# Altium PCB FPGA_Board.PcbDoc (part 1 of 10)
Units mm, origin at the board's own origin, x right, y up, seen from the top; angles counter-clockwise.
Board outline 103.63 x 86.08 mm, 2 copper layers (Top Layer, Bottom Layer); 109 components, 200 nets, 667 pads, 237 vias.
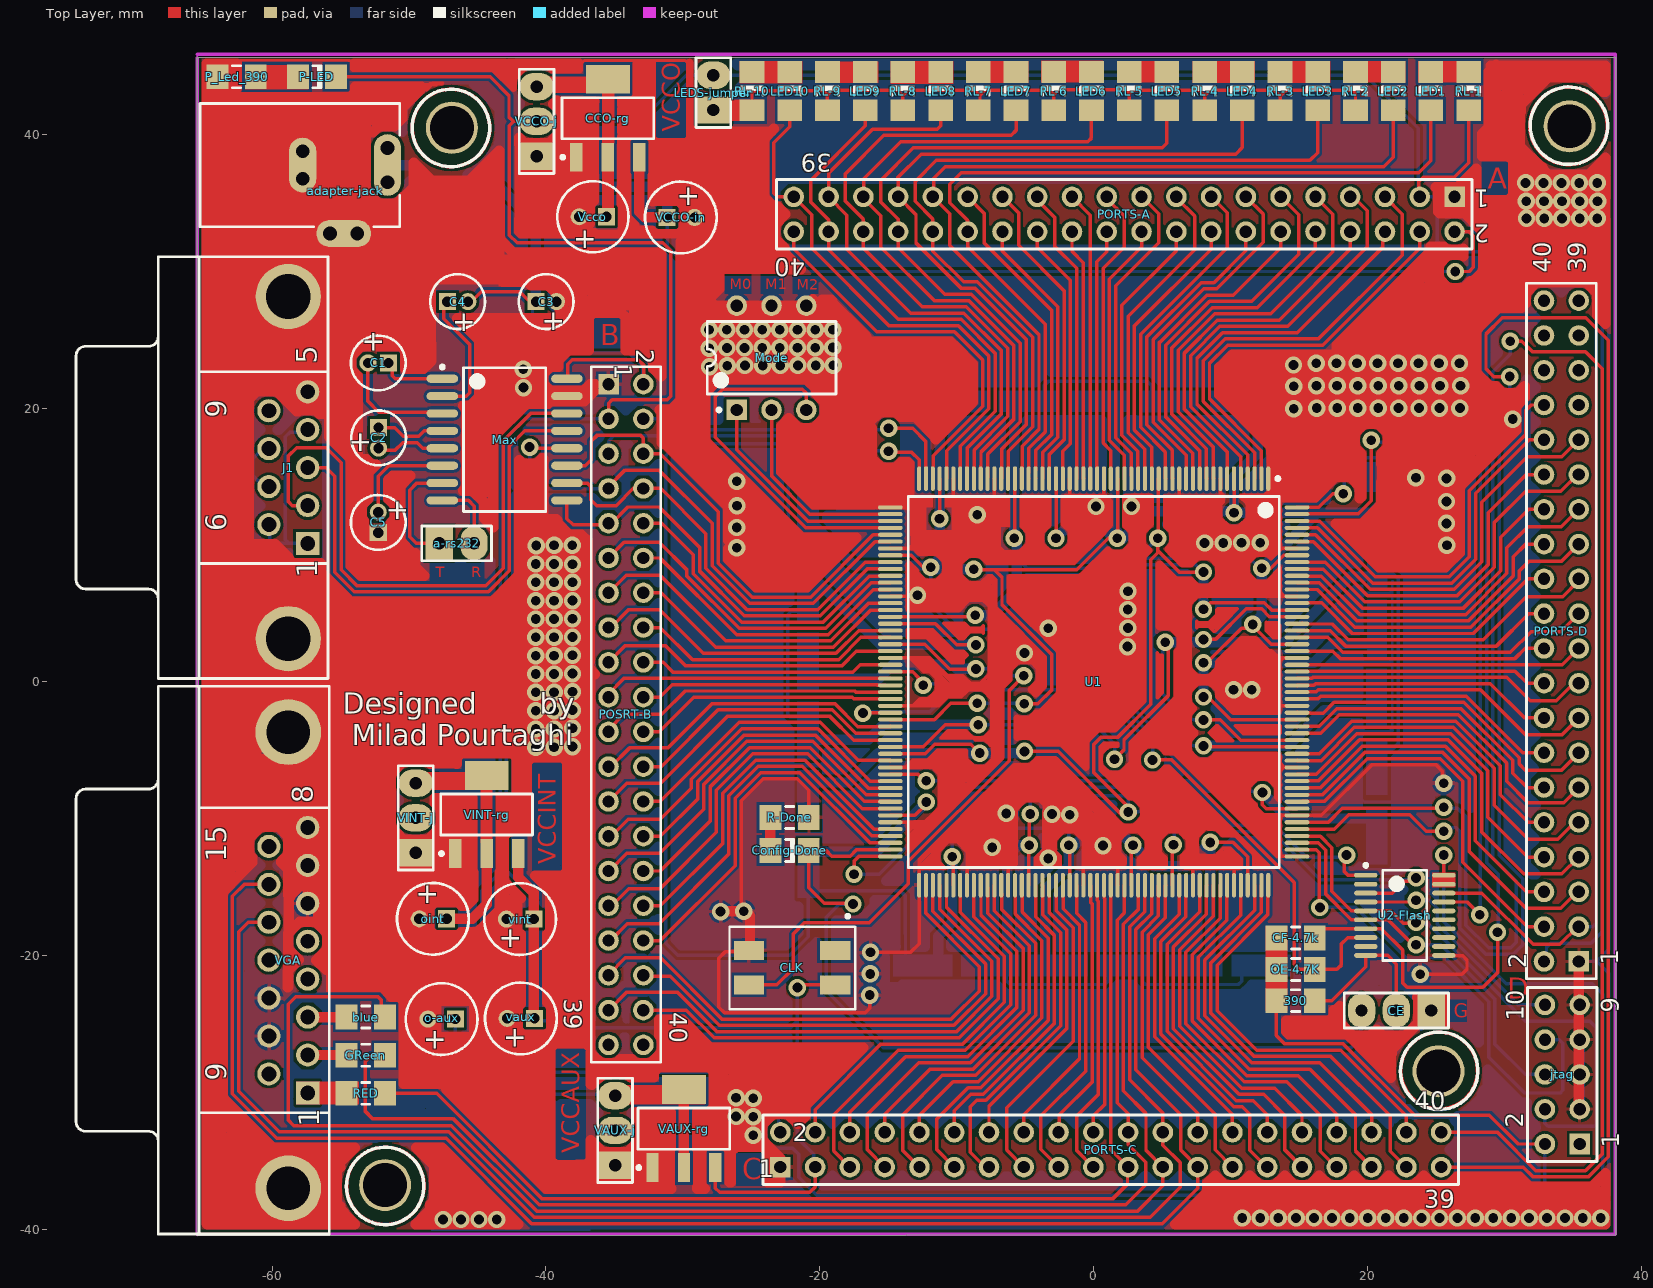
[diagram p0: Top Layer view]
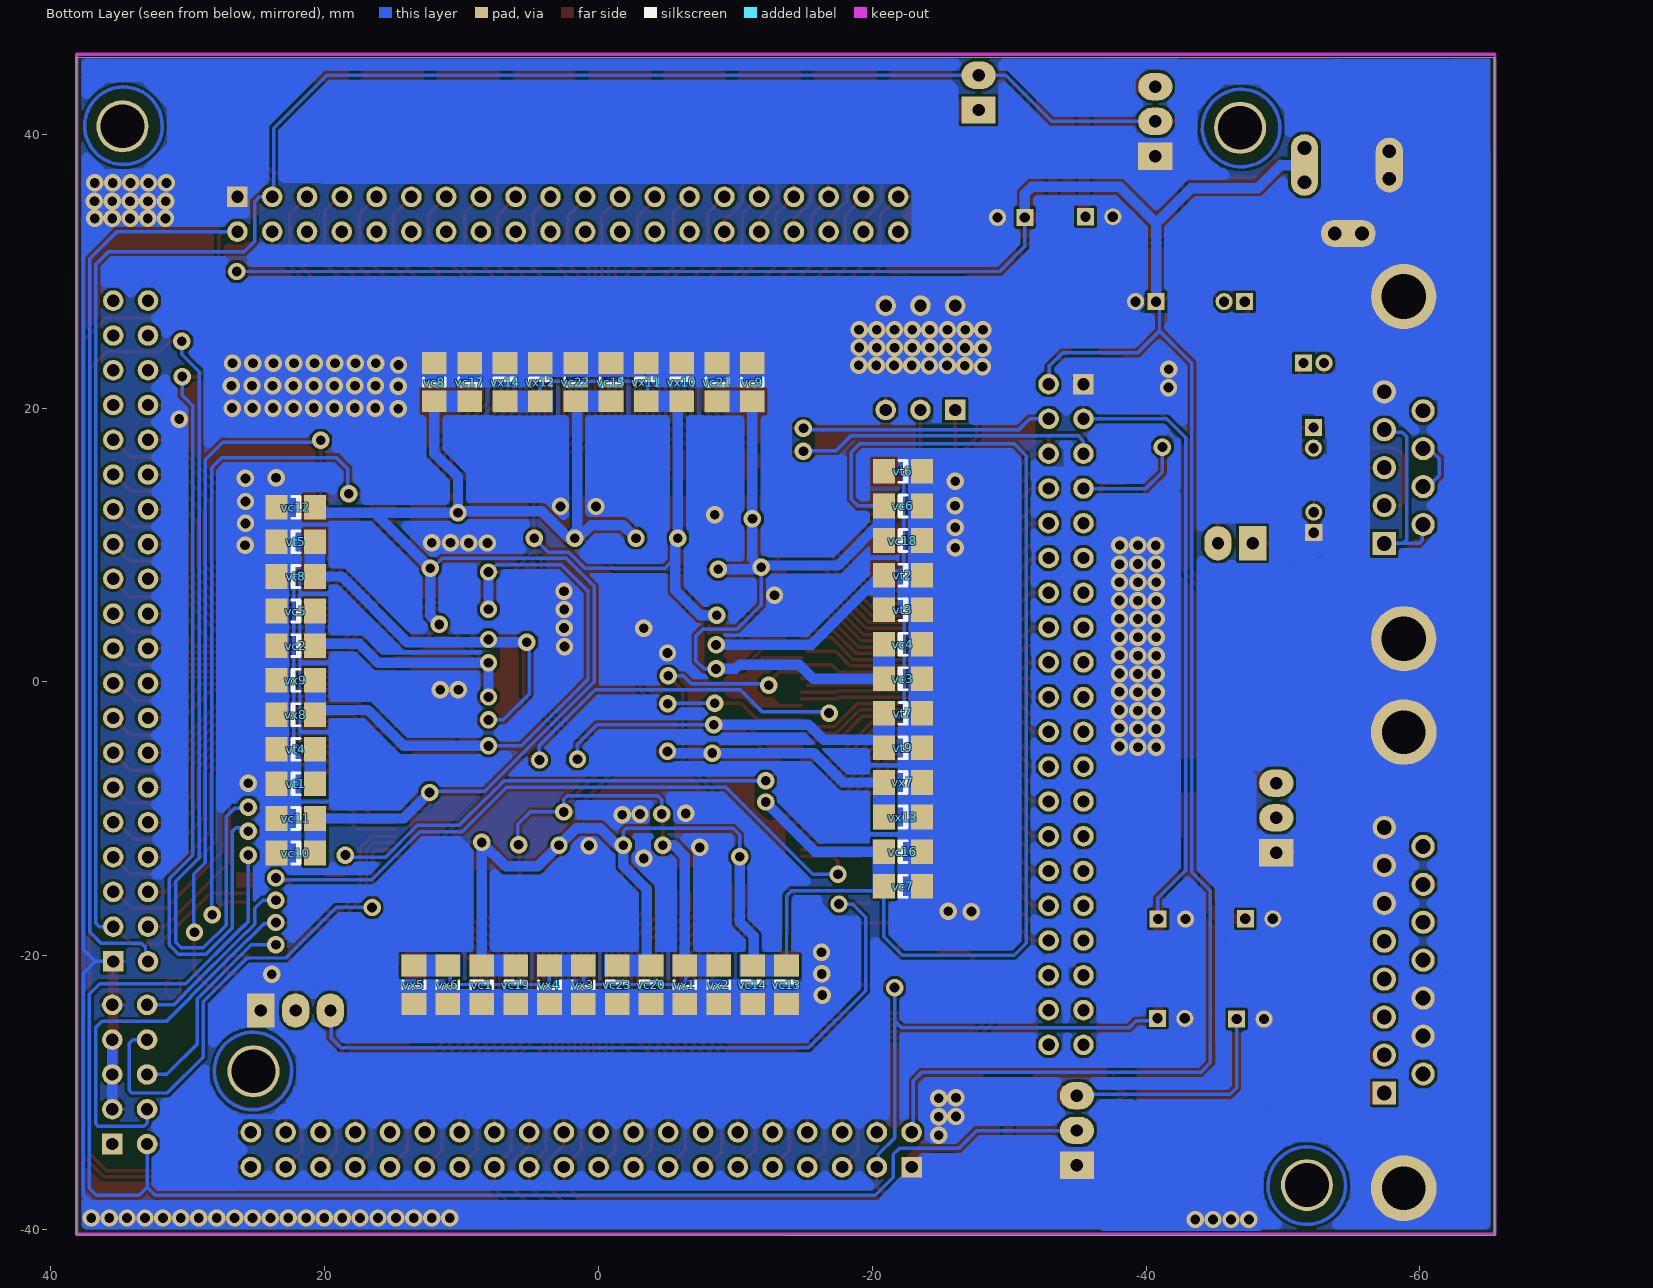
[diagram p1: Bottom Layer view, seen from below]

## Layer stack, top to bottom
Top Solder: solder mask 0.0102, Solder Resist, Dk 3.5
Top Layer: signal copper 0.0356
Dielectric1: dielectric 0.32, FR-4, Dk 4.8
Bottom Layer: signal copper 0.0356
Bottom Solder: solder mask 0.0102, Solder Resist, Dk 3.5

## Board outline
-65.482,-40.46 38.118,-40.383 38.148,45.62 -65.482,45.6

## Design rules (kind name [scope] priority, off if disabled: settings)
Clearance [All] p1: gap=0.203 ignorepadtopadclearanceinfootprint=FALSE except(0: Arc-Hole Track-Hole SMDPad-Hole THPad-Hole Via-Hole Fill-Hole Poly-Hole Region-Hole Text-Hole)
PolygonConnect [All] p1: connectstyle=Relief reliefconductorwidth=0.254 reliefentries=4 polygonreliefangle="90 Angle" airgapwidth=0.254
RoutingVias [All] p1: holewidth=0.711 width=1.27 viastyle="Through Hole" minholewidth=0.711 minwidth=1.27 maxholewidth=0.711 maxwidth=1.27
SilkToSolderMaskClearance SilkscreenOverComponentPads [IsPad] p1: minsilkscreentomaskgap=0.254 clearancetoexposedcopper=TRUE
SolderMaskExpansion [All] p1: expansion=0.102
Width [All] p1: maxlimit=0.762 minlimit=0.203 preferedwidth=0.279
29 further rules are at their usual default settings.

## Components (designator, comment, footprint, x,y, rotation, side; value= is the part's Value field where it differs from the comment)
390 "RES" 8-1206 14.75,-23.275 r0 top
a-rs232 "MHDR1X2" HDR1X2 -47.795,10.125 r0 top
adapter-jack "PWR2.5" KLD-0202 -65.275,37.75 r0 top
blue "RES" 8RB-1206 -53.163,-24.475 r180 top
C1 "94SH105X0025ABP" A' -52.25,23.3 r180 top
C2 "94SH105X0025ABP" A' -52.225,17.825 r270 top
C3 "94SH105X0025ABP" A' -39.985,27.775 r0 top
C4 "94SH105X0025ABP" A' -46.453,27.775 r0 top
C5 "94SH105X0025ABP" A' -52.25,11.65 r90 top
CCO-rg "AMS1117 3.3" MP04A_L -35.479,41.175 r90 top
CE "Header 3" HDR1X3 24.65,-24 r180 top
CF-4.7k "RES" 8-1206 14.75,-18.7 r0 top
CLK "50MHZ" 50mhz -22.025,-20.875 r270 top
Config-Done "HSMX-C670" 1206 -22.205,-12.313 r180 top
GReen "RES" 8RB-1206 -53.163,-27.263 r180 top
J1 "D Connector 9" DSUB1.385-2H9 -68.322,15.65 r90 top
jtag "MHDR2X5" HDR2X5 35.5,-33.75 r90 top
LED1 "HSMX-C670" 1206 24.633,43.15 r270 top
LED2 "HSMX-C670" 1206 21.879,43.15 r270 top
LED3 "HSMX-C670" 1206 16.369,43.15 r270 top
LED4 "HSMX-C670" 1206 10.86,43.15 r270 top
LED5 "HSMX-C670" 1206 5.35,43.15 r270 top
LED6 "HSMX-C670" 1206 -0.159,43.15 r270 top
LED7 "HSMX-C670" 1206 -5.669,43.15 r270 top
LED8 "HSMX-C670" 1206 -11.178,43.15 r270 top
LED9 "HSMX-C670" 1206 -16.688,43.15 r270 top
LED10 "HSMX-C670" 1206 -22.197,43.15 r270 top
LEDS-jumper "Header 2" HDR1X2 -27.772,41.77 r90 top
Max "MAX232CWE" WSO16_N -43.021,17.7 r0 top
Mode "SW DIP-3" DIP-6 -23.525,23.675 r90 top
o-aux "100uf" B -47.619,-24.625 r180 top
OE-4.7K "RES" 8-1206 14.75,-21 r0 top
oint "100uf" B -48.257,-17.3 r180 top
P-LED "HSMX-C670" 1206 -56.725,44.2 r180 top
P_Led_390 "RES" 8-1206 -62.6,44.2 r180 top
PORTS-A "MHDR2X20" HDR2X20 26.36,35.429 r180 top
PORTS-C "MHDR2X20" HDR2X20 -22.882,-35.435 r0 top
PORTS-D "MHDR2X20" HDR2X20 35.433,-20.415 r90 top
POSRT-B "MHDR2X20" HDR2X20 -35.429,21.75 r270 top
R-Done "RES" 8RB-1206 -22.205,-9.9 r0 top
RED "RES" 8RB-1206 -53.163,-30.05 r180 top
RL-1 "RES" 1206 27.388,43.15 r270 top
RL-2 "RES" 1206 19.124,43.15 r270 top
RL-3 "RES" 1206 13.614,43.15 r270 top
RL-4 "RES" 1206 8.105,43.15 r270 top
RL-5 "RES" 1206 2.595,43.15 r270 top
RL-6 "RES" 1206 -2.914,43.15 r270 top
RL-7 "RES" 1206 -8.424,43.15 r270 top
RL-8 "RES" 1206 -13.933,43.15 r270 top
RL-9 "RES" 1206 -19.443,43.15 r270 top
RL-10 "RES" 1206 -24.952,43.15 r270 top
U1 "XC3S400-4PQ208C" PQ208_N 0.003,0 r270 top
U2-Flash "XCF02SVO20C" VO20_N 22.725,-17.05 r0 top
vaux "100uf" B -41.833,-24.575 r180 top
VAUX-j "" HDR1X3 -34.95,-35.3 r90 top
VAUX-rg "AMS1117 2.5" SOT223_L -29.925,-32.625 r90 top
vc1 "" 1206 8.519,-22.12 r270 bottom
vc2 "" 1206 22.1,2.65 r0 bottom
vc3 "" 1206 -22.25,0.228 r180 bottom
vc4 "" 1206 -22.25,2.752 r180 bottom
vc5 "" 1206 22.1,5.175 r0 bottom
vc6 "" 1206 -22.25,12.85 r180 bottom
vc7 "" 1206 -22.25,-14.92 r180 bottom
vc8 "" 1206 11.975,21.9 r90 bottom
vc9 "" 1206 -11.25,21.9 r90 bottom
vc10 "" 1206 22.1,-12.5 r0 bottom
vc11 "" 1206 22.1,-9.975 r0 bottom
vc12 "" 1206 22.1,12.75 r0 bottom
vc13 "" 1206 -13.742,-22.12 r270 bottom
vc14 "" 1206 -11.269,-22.12 r270 bottom
vc15 "" 1206 -0.928,21.9 r90 bottom
vc16 "" 1206 -22.25,-12.395 r180 bottom
vc17 "" 1206 9.394,21.9 r90 bottom
vc18 "" 1206 -22.25,10.326 r180 bottom
vc19 "" 1206 6.045,-22.12 r270 bottom
vc20 "" 1206 -3.848,-22.12 r270 bottom
vc21 "" 1206 -8.669,21.9 r90 bottom
vc22 "" 1206 1.653,21.9 r90 bottom
vc23 "" 1206 -1.375,-22.12 r270 bottom
Vcco "100uf" B -36.575,33.975 r180 top
VCCO-in "100uf" B -30.151,33.925 r0 top
VCCO-j "" HDR1X3 -40.678,38.4 r90 top
VGA "D Connector 15" DSUB1.385-2H15 -68.322,-20.325 r90 top
vint "100uf" B -41.888,-17.325 r180 top
VINT-j "" HDR1X3 -49.512,-12.47 r90 top
VINT-rg "AMS1117 1.2" MP04A_L -44.332,-9.69 r90 top
vt1 "" 1206 22.1,-7.45 r180 bottom
vt2 "" 1206 -22.25,7.801 r0 bottom
vt3 "" 1206 -22.25,5.277 r0 bottom
vt4 "" 1206 22.1,-4.925 r180 bottom
vt5 "" 1206 22.1,10.225 r180 bottom
vt6 "" 1206 -22.25,15.375 r0 bottom
vt7 "" 1206 -22.25,-2.297 r0 bottom
vt8 "" 1206 22.1,7.7 r180 bottom
vt9 "" 1206 -22.25,-4.822 r0 bottom
vx1 "" 1206 -6.322,-22.12 r90 bottom
vx2 "" 1206 -8.795,-22.12 r90 bottom
vx3 "" 1206 1.099,-22.12 r90 bottom
vx4 "" 1206 3.572,-22.12 r90 bottom
vx5 "" 1206 13.466,-22.12 r90 bottom
vx6 "" 1206 10.992,-22.12 r90 bottom
vx7 "" 1206 -22.25,-7.346 r0 bottom
vx8 "" 1206 22.1,-2.4 r180 bottom
vx9 "" 1206 22.1,0.125 r180 bottom
vx10 "" 1206 -6.089,21.9 r270 bottom
vx11 "" 1206 -3.508,21.9 r270 bottom
vx12 "" 1206 4.233,21.9 r270 bottom
vx13 "" 1206 -22.25,-9.871 r0 bottom
vx14 "" 1206 6.814,21.9 r270 bottom

## Footprints (in the part's own frame and the unit in brackets; to place one, negate y for a bottom-side part, rotate by r counter-clockwise, add the part's x,y. Pads: shape width x height; smd on the part's side, far side on the other; paste and mask are expansions set on the pad)
8-1206 [mm] "Chip Resistor; Body 3.1 x 1.6 mm (LxW typ)"
  rect 1.6x1.8 smd: 1(-1.4,0) 2(1.4,0)
  silkscreen extent -0.3,-0.8 0.3,0.8
8RB-1206 [mm] "Chip Resistor; Body 3.2 x 1.6 mm (LxW typ)"
  rect 1.6x1.8 smd: 1(-1.4,0) 2(1.4,0)
  silkscreen extent -0.3,-0.8 0.3,0.8
50mhz [mm]
  rect 1.4x2.2 smd: 1(-1.25,3.15) 2(-1.25,-3.15) 3(1.25,-3.15) 4(1.25,3.15)
  silkscreen extent -3.88,-4.57 3.02,4.62
1206 [mm] "Chip Capacitor; Body 3.2 x 1.6 mm (LxW typ)"
  rect 1.6x1.8 smd: 1(-1.4,0) 2(1.4,0)
  silkscreen extent -0.3,-0.8 0.3,0.8
A' [mm] "Capacitor, Electrolytic, Radial; Body 4 x 5 mm (Dia.xH typ); Pin Spacing 1.5 mm (typ)"
  rect 1.25x1.25 hole 0.75: 1(-0.75,0)
  round 1.25 hole 0.75: 2(0.75,0)
  silkscreen extent -2,-2 2,2
B [mm] "Capacitor, Electrolytic, Radial; Body 5 x 6.8 mm (Dia.xH typ); Pin Spacing 2 mm (typ)"
  rect 1.25x1.25 hole 0.75: 1(-1,0)
  round 1.25 hole 0.75: 2(1,0)
  silkscreen extent -2.62,-2.62 2.62,2.62
DIP-6 [mm] "DIP; 6 Leads; Row Spacing 7.62 mm; Pitch 2.54 mm"
  rect 1.5x1.5 hole 0.9: 1(-3.81,2.54)
  round 1.5 hole 0.9: 2(-3.81,0) 3(-3.81,-2.54) 4(3.81,-2.54) 5(3.81,0) 6(3.81,2.54)
  silkscreen extent -3.93,-4.7 2.65,4.7, body extent -3.55,-4.7 3.55,4.7, height 5.46
DSUB1.385-2H9 [mm] "Connector; D Subminiature; 9 Position; Right Angle; Pitch 1.385 mm"
  rect 1.69x1.69 hole 1.09: 1(-5.54,-10.92)
  round 1.69 hole 1.09: 2(-2.77,-10.92) 3(0,-10.92) 4(2.77,-10.92) 5(5.54,-10.92) 6(-4.155,-8.08) 7(-1.385,-8.08) 8(1.385,-8.08) 9(4.155,-8.08)
  round 4.76 hole 3.26: 10(-12.495,-9.5) 11(12.495,-9.5)
  silkscreen extent -15.4,-12.4 15.4,6
DSUB1.385-2H15 [mm] "Connector; D Subminiature; 15 Position; Right Angle; Pitch 1.385 mm"
  rect 1.69x1.69 hole 1.09: 1(-9.695,-10.92)
  round 1.69 hole 1.09: 2(-6.925,-10.92) 3(-4.155,-10.92) 4(-1.385,-10.92) 5(1.385,-10.92) 6(4.155,-10.92) 7(6.925,-10.92) 8(9.695,-10.92) 9(-8.31,-8.08) 10(-5.54,-8.08) 11(-2.77,-8.08) 12(0,-8.08) 13(2.77,-8.08) 14(5.54,-8.08) 15(8.31,-8.08)
  round 4.8 hole 3.18: 16(-16.66,-9.5) 17(16.66,-9.5)
  silkscreen extent -20,-12.5 20,6
HDR1X2 [mm] "Connector; Header; 2 Position"
  rect 2x2.5 hole 0.9: 1(0,0)
  oval 2x2.5 hole 0.9: 2(2.54,0)
  silkscreen extent -1.27,-1.27 3.81,1.27
HDR1X3 [mm] "Connector; Header; 3 Position"
  rect 2x2.5 hole 0.9: 1(0,0)
  oval 2x2.5 hole 0.9: 2(2.54,0) 3(5.08,0)
  silkscreen extent -1.27,-1.27 6.35,1.27
HDR2X5 [mm] "Connector; Header; 5x2 Position"
  rect 1.5x1.5 hole 0.9: 1(0,0)
  round 1.5 hole 0.9: 2(0,2.54) 3(2.54,0) 4(2.54,2.54) 5(5.08,0) 6(5.08,2.54) 7(7.62,0) 8(7.62,2.54) 9(10.16,0) 10(10.16,2.54)
  silkscreen extent -1.27,-1.27 11.43,3.81
HDR2X20 [mm] "Connector; Header; 20x2 Position"
  rect 1.5x1.5 hole 0.9: 1(0,0)
  round 1.5 hole 0.9: 2(0,2.54) 3(2.54,0) 4(2.54,2.54) 5(5.08,0) 6(5.08,2.54) 7(7.62,0) 8(7.62,2.54) 9(10.16,0) 10(10.16,2.54) 11(12.7,0) 12(12.7,2.54) 13(15.24,0) 14(15.24,2.54) 15(17.78,0) 16(17.78,2.54) 17(20.32,0) 18(20.32,2.54) 19(22.86,0) 20(22.86,2.54) 21(25.4,0) 22(25.4,2.54) 23(27.94,0) 24(27.94,2.54) 25(30.48,0) 26(30.48,2.54) 27(33.02,0) 28(33.02,2.54) 29(35.56,0) 30(35.56,2.54) 31(38.1,0) 32(38.1,2.54) 33(40.64,0) 34(40.64,2.54) 35(43.18,0) 36(43.18,2.54) 37(45.72,0) 38(45.72,2.54) 39(48.26,0) 40(48.26,2.54)
  silkscreen extent -1.27,-1.27 49.53,3.81
KLD-0202 [mm] "DC Power Jack, 2.5mm, KLD Series, PCB Mount"
  oval 2x4.5 all layers, no hole: 1(13.7,0)
  round 1.5 hole 1: 1A(13.7,-1.25) 1B(13.7,1.25) 2A(7.5,-1) 2B(7.5,1) 3A(9.5,-5) 3B(11.5,-5)
  oval 2x4 all layers, no hole: 2(7.5,0)
  oval 4x2 all layers, no hole: 3(10.5,-5)
  silkscreen extent 0,-4.5 14.6,4.5
MP04A_L [mm] "SOT223, 4-Leads, Body 6.5x3.5mm, Pitch 2.3mm, Lead Span 7mm, IPC High Density"
  rect 2.1x0.9 smd: 1(-2.85,2.3) 2(-2.85,0) 3(-2.85,-2.3)
  rect 2.1x3.2 smd: 4(2.85,0)
  silkscreen extent -2.97,-3.35 1.5,3.42, body extent -1.85,-3.35 1.85,3.35, height 1.8
PQ208_N [mm] "Shrink QFP, 208-Leads, Body 28x28mm, Pitch 0.5mm, IPC Medium Density"
  oval 1.8x0.3 smd: 1(-14.85,12.75) 2(-14.85,12.25) 3(-14.85,11.75) 4(-14.85,11.25) 5(-14.85,10.75) 6(-14.85,10.25) 7(-14.85,9.75) 8(-14.85,9.25) 9(-14.85,8.75) 10(-14.85,8.25) 11(-14.85,7.75) 12(-14.85,7.25) 13(-14.85,6.75) 14(-14.85,6.25) 15(-14.85,5.75) 16(-14.85,5.25) 17(-14.85,4.75) 18(-14.85,4.25) 19(-14.85,3.75) 20(-14.85,3.25) 21(-14.85,2.75) 22(-14.85,2.25) 23(-14.85,1.75) 24(-14.85,1.25) 25(-14.85,0.75) 26(-14.85,0.25) 27(-14.85,-0.25) 28(-14.85,-0.75) 29(-14.85,-1.25) 30(-14.85,-1.75) 31(-14.85,-2.25) 32(-14.85,-2.75) 33(-14.85,-3.25) 34(-14.85,-3.75) 35(-14.85,-4.25) 36(-14.85,-4.75) 37(-14.85,-5.25) 38(-14.85,-5.75) 39(-14.85,-6.25) 40(-14.85,-6.75) 41(-14.85,-7.25) 42(-14.85,-7.75) 43(-14.85,-8.25) 44(-14.85,-8.75) 45(-14.85,-9.25) 46(-14.85,-9.75) 47(-14.85,-10.25) 48(-14.85,-10.75) 49(-14.85,-11.25) 50(-14.85,-11.75) 51(-14.85,-12.25) 52(-14.85,-12.75) 105(14.85,-12.75) 106(14.85,-12.25) 107(14.85,-11.75) 108(14.85,-11.25) 109(14.85,-10.75) 110(14.85,-10.25) 111(14.85,-9.75) 112(14.85,-9.25) 113(14.85,-8.75) 114(14.85,-8.25) 115(14.85,-7.75) 116(14.85,-7.25) 117(14.85,-6.75) 118(14.85,-6.25) 119(14.85,-5.75) 120(14.85,-5.25) 121(14.85,-4.75) 122(14.85,-4.25) 123(14.85,-3.75) 124(14.85,-3.25) 125(14.85,-2.75) 126(14.85,-2.25) 127(14.85,-1.75) 128(14.85,-1.25) 129(14.85,-0.75) 130(14.85,-0.25) 131(14.85,0.25) 132(14.85,0.75) 133(14.85,1.25) 134(14.85,1.75) 135(14.85,2.25) 136(14.85,2.75) 137(14.85,3.25) 138(14.85,3.75) 139(14.85,4.25) 140(14.85,4.75) 141(14.85,5.25) 142(14.85,5.75) 143(14.85,6.25) 144(14.85,6.75) 145(14.85,7.25) 146(14.85,7.75) 147(14.85,8.25) 148(14.85,8.75) 149(14.85,9.25) 150(14.85,9.75) 151(14.85,10.25) 152(14.85,10.75) 153(14.85,11.25) 154(14.85,11.75) 155(14.85,12.25) 156(14.85,12.75)
  oval 0.3x1.8 smd: 53(-12.75,-14.85) 54(-12.25,-14.85) 55(-11.75,-14.85) 56(-11.25,-14.85) 57(-10.75,-14.85) 58(-10.25,-14.85) 59(-9.75,-14.85) 60(-9.25,-14.85) 61(-8.75,-14.85) 62(-8.25,-14.85) 63(-7.75,-14.85) 64(-7.25,-14.85) 65(-6.75,-14.85) 66(-6.25,-14.85) 67(-5.75,-14.85) 68(-5.25,-14.85) 69(-4.75,-14.85) 70(-4.25,-14.85) 71(-3.75,-14.85) 72(-3.25,-14.85) 73(-2.75,-14.85) 74(-2.25,-14.85) 75(-1.75,-14.85) 76(-1.25,-14.85) 77(-0.75,-14.85) 78(-0.25,-14.85) 79(0.25,-14.85) 80(0.75,-14.85) 81(1.25,-14.85) 82(1.75,-14.85) 83(2.25,-14.85) 84(2.75,-14.85) 85(3.25,-14.85) 86(3.75,-14.85) 87(4.25,-14.85) 88(4.75,-14.85) 89(5.25,-14.85) 90(5.75,-14.85) 91(6.25,-14.85) 92(6.75,-14.85) 93(7.25,-14.85) 94(7.75,-14.85) 95(8.25,-14.85) 96(8.75,-14.85) 97(9.25,-14.85) 98(9.75,-14.85) 99(10.25,-14.85) 100(10.75,-14.85) 101(11.25,-14.85) 102(11.75,-14.85) 103(12.25,-14.85) 104(12.75,-14.85) 157(12.75,14.85) 158(12.25,14.85) 159(11.75,14.85) 160(11.25,14.85) 161(10.75,14.85) 162(10.25,14.85) 163(9.75,14.85) 164(9.25,14.85) 165(8.75,14.85) 166(8.25,14.85) 167(7.75,14.85) 168(7.25,14.85) 169(6.75,14.85) 170(6.25,14.85) 171(5.75,14.85) 172(5.25,14.85) 173(4.75,14.85) 174(4.25,14.85) 175(3.75,14.85) 176(3.25,14.85) 177(2.75,14.85) 178(2.25,14.85) 179(1.75,14.85) 180(1.25,14.85) 181(0.75,14.85) 182(0.25,14.85) 183(-0.25,14.85) 184(-0.75,14.85) 185(-1.25,14.85) 186(-1.75,14.85) 187(-2.25,14.85) 188(-2.75,14.85) 189(-3.25,14.85) 190(-3.75,14.85) 191(-4.25,14.85) 192(-4.75,14.85) 193(-5.25,14.85) 194(-5.75,14.85) 195(-6.25,14.85) 196(-6.75,14.85) 197(-7.25,14.85) 198(-7.75,14.85) 199(-8.25,14.85) 200(-8.75,14.85) 201(-9.25,14.85) 202(-9.75,14.85) 203(-10.25,14.85) 204(-10.75,14.85) 205(-11.25,14.85) 206(-11.75,14.85) 207(-12.25,14.85) 208(-12.75,14.85)
  silkscreen extent -14.97,-13.55 13.55,13.58, body extent -14,-14 14,14, height 4.1
SOT223_L [mm] "SOT223, 4-Leads, Body 6.5x3.5mm, Pitch 2.3mm, Lead Span 7mm, IPC High Density"
  rect 2.1x0.9 smd: 1(-2.85,2.3) 2(-2.85,0) 3(-2.85,-2.3)
  rect 2.1x3.2 smd: 4(2.85,0)
  silkscreen extent -2.97,-3.35 1.5,3.42, body extent -1.85,-3.35 1.85,3.35, height 1.7
VO20_N [mm] "TSOP, 20-Leads, Body 6.5x4.4mm, Pitch 0.65mm, IPC Medium Density"
  oval 1.7x0.35 smd: 1(-2.85,2.925) 2(-2.85,2.275) 3(-2.85,1.625) 4(-2.85,0.975) 5(-2.85,0.325) 6(-2.85,-0.325) 7(-2.85,-0.975) 8(-2.85,-1.625) 9(-2.85,-2.275) 10(-2.85,-2.925) 11(2.85,-2.925) 12(2.85,-2.275) 13(2.85,-1.625) 14(2.85,-0.975) 15(2.85,-0.325) 16(2.85,0.325) 17(2.85,0.975) 18(2.85,1.625) 19(2.85,2.275) 20(2.85,2.925)
  silkscreen extent -2.97,-3.3 1.6,3.77, body extent -2.25,-3.3 2.25,3.3, height 1.2
WSO16_N [mm] "SOIC, 16-Leads, Body 10.3x7.5mm, Pitch 1.27mm, IPC Medium Density"
  oval 2.3x0.6 smd: 1(-4.55,4.445) 2(-4.55,3.175) 3(-4.55,1.905) 4(-4.55,0.635) 5(-4.55,-0.635) 6(-4.55,-1.905) 7(-4.55,-3.175) 8(-4.55,-4.445) 9(4.55,-4.445) 10(4.55,-3.175) 11(4.55,-1.905) 12(4.55,-0.635) 13(4.55,0.635) 14(4.55,1.905) 15(4.55,3.175) 16(4.55,4.445)
  silkscreen extent -4.67,-5.25 3,5.42, body extent -3.75,-5.25 3.75,5.25, height 2.65

## Part data
390 blue CF-4.7k GReen OE-4.7K P_Led_390 R-Done RED RL-1 RL-2 RL-3 RL-4 RL-5 RL-6 RL-7 RL-8 RL-9 RL-10: "Resistor"
a-rs232 LEDS-jumper: "Header, 2-Pin"
adapter-jack: "Low Voltage Power Supply Connector"
C1 C2 C3 C4 C5: "Solid Aluminum Capacitor with Organic Semiconductor Electrolyte: 1uF, 25V, Bulk Pack"
CCO-rg VAUX-rg VINT-rg: library part REG1117-3.3, "800mA and 1A Low Dropout Positive Regulator 2.85V, 3.3V, 5V, and Adjustable"
CE: "Header, 3-Pin"
Config-Done LED1 LED2 LED3 LED4 LED5 LED6 LED7 LED8 LED9 LED10 P-LED: "RED AS AlGaAs SMD LED"
J1: "Receptacle Assembly, 9 Position, Right Angle"
jtag: "Header, 5-Pin, Dual row"
Max: "+5V Powered RS-232 Driver/Receiver"
Mode: "DIP Switch, 3 Position, SPST"
o-aux oint vaux Vcco vint: library part 94SA107X0016EBP, "Solid Aluminum Capacitor with Organic Semiconductor Electrolyte: 100uF, 16V, Bulk Pack"
PORTS-A PORTS-C PORTS-D POSRT-B: "Header, 20-Pin, Dual row"
U1: "Spartan-3 1.2V FPGA, 141 User I/Os, 208-Pin PQFP, Standard Performance, Commercial Grade"
U2-Flash: "XCF00S Series, Platform Flash In-System Programmable Configuration 3.3V PROM, 20-Pin TSOP, 2-Megabit, Commercial Grade"
VAUX-j VCCO-j VINT-j: library part "Header 3", "Header, 3-Pin"
vc1 vc2 vc3 vc4 vc5 vc6 vc7 vc8 vc9 vc10 vc11 vc12 vc13 vc14 vc15 vc16 vc17 vc18 vc19 vc20 vc21 vc22 vc23 vt1 vt2 vt3 vt4 vt5 vt6 vt7 vt8 vt9 vx1 vx2 vx3 vx4 vx5 vx6 vx7 vx8 vx9 vx10 vx11 vx12 vx13 vx14: library part C1206, "Ceramic Chip Capacitor - Standard"
VCCO-in: library part TC10-6C3RM, "Subminiature, Leaded Solid Tantalum Capacitor: Radial-Lead, Polarised, 10uF, 20% Tolerance, 6 WVDC @ +85°C"
VGA: "Receptacle Assembly, 15 Position, Right Angle"

## Free pads (board coordinates)
  round 3.8 hole 3.2: 0(25.185,-28.439) 1(-51.75,-36.75) 2(-46.875,40.475) 3(34.761,40.58)

## Via types
v1: diameter 1.27, hole 0.711, Top Layer to Bottom Layer, 237 vias

## Nets (pads, with @x,y where several pads share a name; then routed paths per layer and width w, separated by ;. In a path a pad name is that pad's centre, name@x,y a point inside that pad or via, vN(x,y) a via of type N, cw(c..) or ccw(c..) an arc to the next point about the centre after c; other vN are vias at no path point)
+5V: adapter-jack.1 adapter-jack.1A adapter-jack.1B C3.1 C4.2 CCO-rg.3 Max.16 PORTS-A.2 PORTS-C.2 PORTS-D.2 POSRT-B.2 VCCO-in.1 | length 281.8
  Top Layer w0.254: C4.2@-45.453,27.775 -44.728,28.5 -41.921,28.5 -41.196,27.775 C3.1@-40.985,27.775 ; Max.16@-38.471,22.145 -38.4,22.216 -38.4,23.2 -38.075,23.525 -33.25,23.525 -32.875,23.15 -32.875,21.764 POSRT-B.2@-32.889,21.75 POSRT-B.2@-32.889,21.599 ; PORTS-A.2@26.36,32.889 27.419,32.889 27.725,32.583 27.725,30.275 27.425,29.975 v1(26.411,29.975)
  Top Layer w0.762: CCO-rg.3@-33.179,38.325 -33.179,34.329 -32.775,33.925 VCCO-in.1@-31.151,33.925
  Bottom Layer w0.254: -40.985,33.225 -40.985,25.63 ; POSRT-B.2@-32.889,21.75 -32.931,21.792 -32.931,23.056 -33.899,24.025 -39.38,24.025 -40.985,25.63 ; VCCO-in.1@-31.151,33.925 -31.151,31.81 -29.316,29.975 v1(26.411,29.975) ; PORTS-C.2@-22.882,-32.895 -23.001,-32.776 -23.001,-29.125 -23.601,-28.525 -43.989,-28.525 -44.704,-27.81 -44.704,-15.25 -43.346,-13.892 -43.346,23.269 -40.985,25.63 ; PORTS-A.2@26.36,32.889 35.161,32.889 37.15,30.9 37.15,-18.25 36.325,-19.075 33.375,-19.075 33.075,-19.375 33.075,-20.233 PORTS-D.2@32.893,-20.415
  Bottom Layer w0.762: adapter-jack.1@-51.575,37.75 -49.833,37.75 -48.151,36.068 -43.306,36.068 -40.735,33.497 ; C3.1@-40.735,27.775 -40.735,33.497 ; VCCO-in.1@-31.151,33.925 -31.151,35.642 -31.663,36.154 -38.078,36.154 -40.735,33.497